# EAGLE board para (EAGLE 6.5.0)
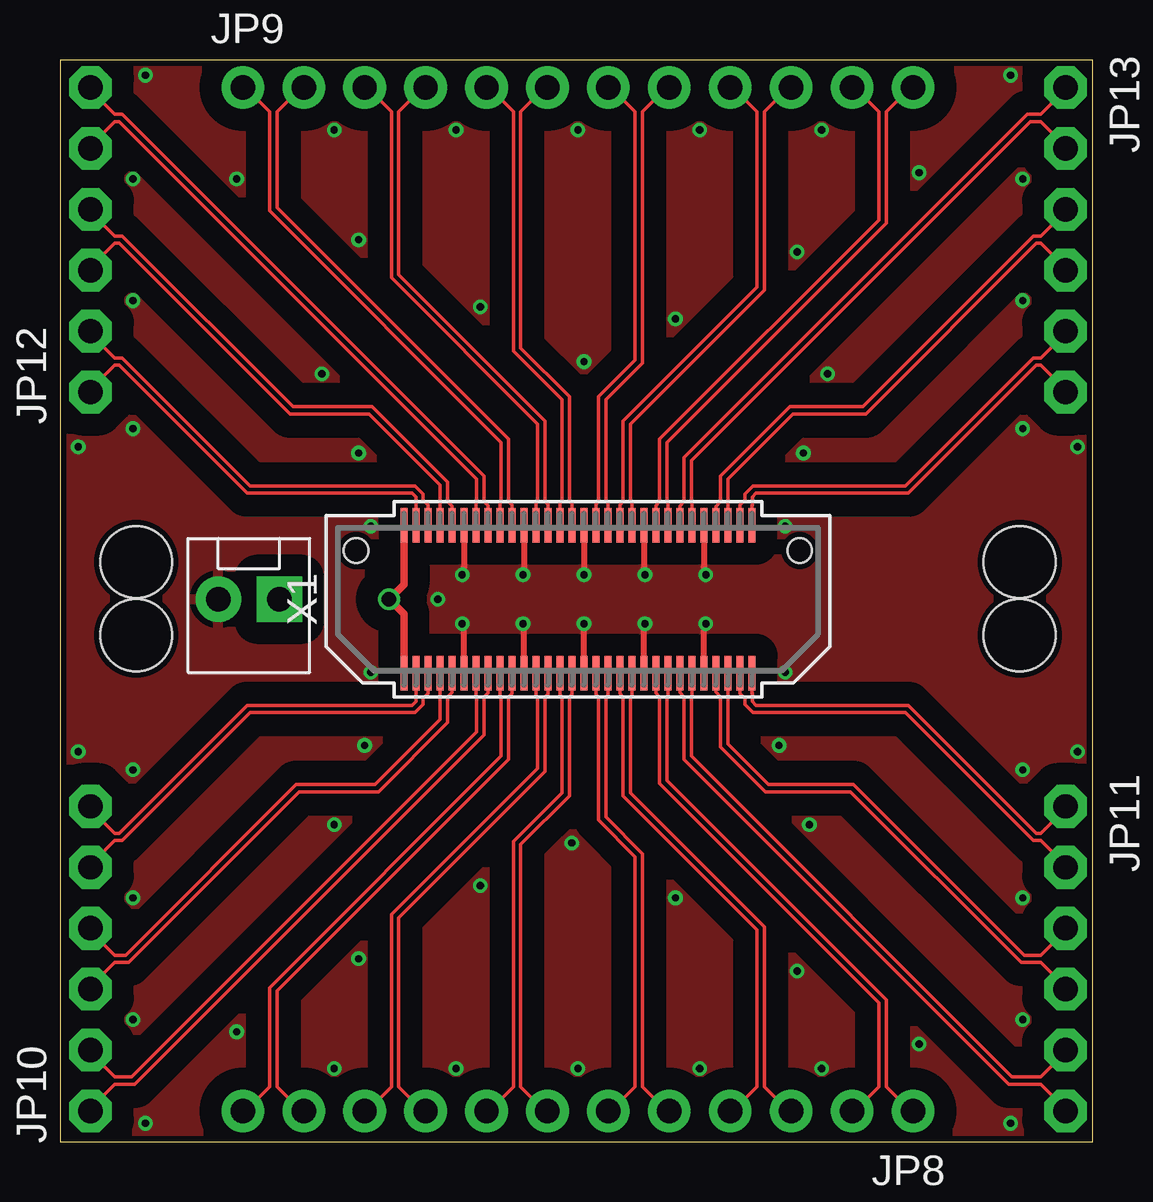
[diagram p0: board, top side]
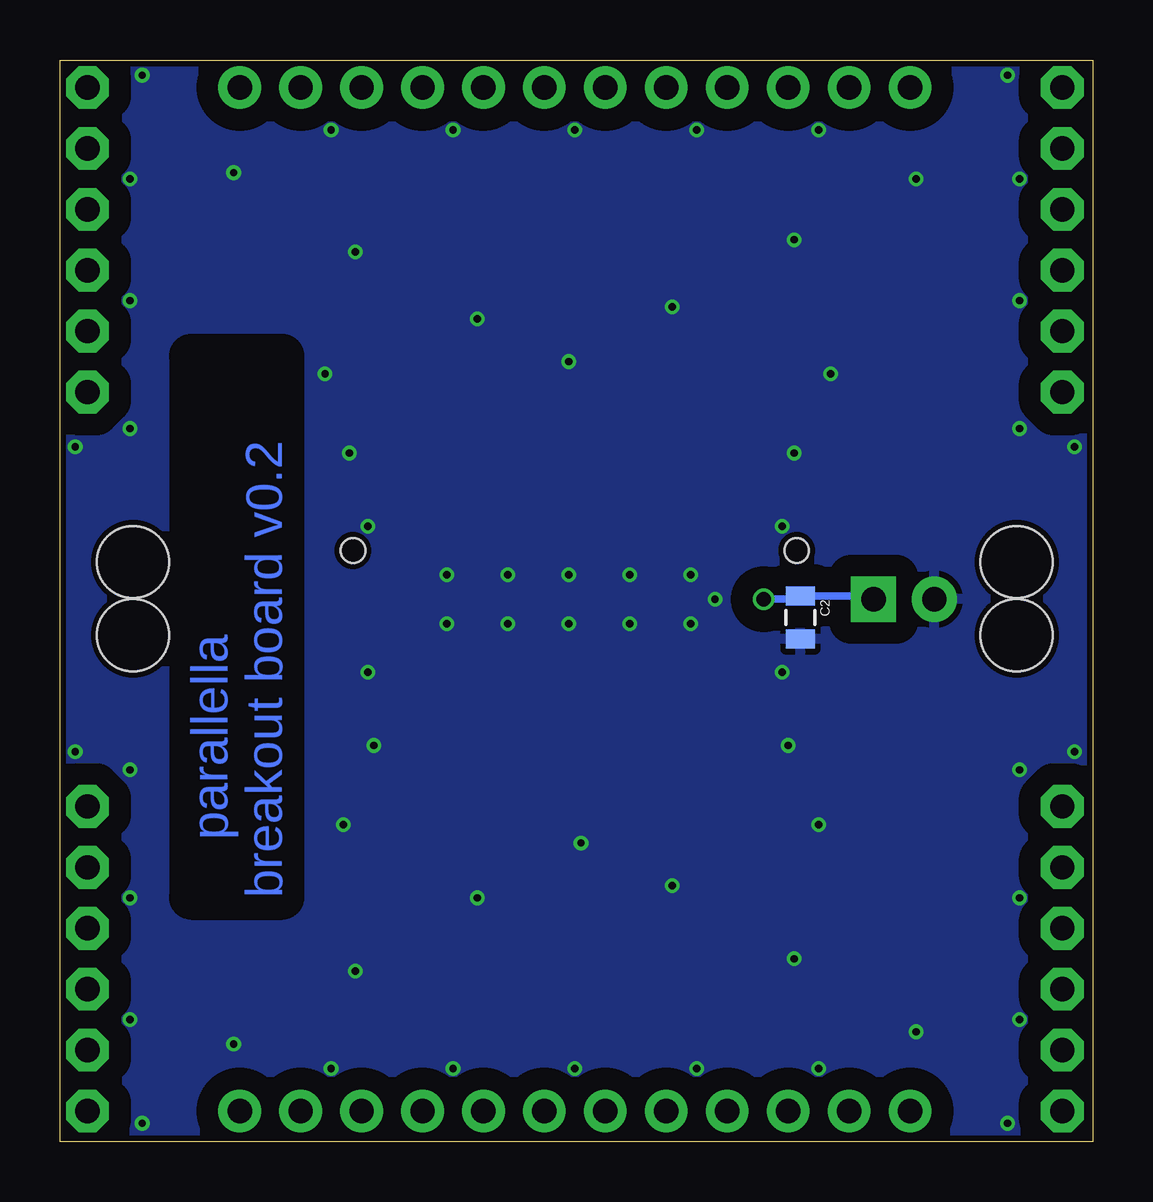
[diagram p1: board, bottom side, seen from below]

Size 43.05 x 45.09 mm. Coordinates in mm from the lower left corner, seen from the top.
Outline: 0,0 43.05,0 43.05,45.09 0,45.09 0,0
Copper layers (1*16): Top 0.035mm / dielectric 1.5mm / Bottom 0.035mm
Design rules "dirt_cheap_dirty_boards.v1": minimum track width 5mil, minimum drill 12mil, track to track 5mil, track to pad 5mil, pad to pad 5mil, via to via 5mil, smd to smd 0mil, copper to edge 10mil, drill to drill 10mil, minimum pad ring 10mil, minimum via ring 6mil, stop-mask expansion 2mil, vias tented up to drill 25mil, thermal gap 10mil
Net classes: 0 default: width 0.254 mm, drill 0.305 mm, clearance 0.254 mm; 1 gnd: width 0.254 mm, drill 0.305 mm, clearance 0.914 mm; 2 sig: width 0.152 mm, drill 0.305 mm, clearance 0.152 mm
Holes 3 mm at 3.17,21.11 3.17,24.16 40.01,24.16 40.01,21.11

## Footprints (pad centres in the part's own frame; a part is rotated, then mirrored left to right if it is on the bottom)
0805 = smd 0.8 x 1.2: 1 -0.9,0; 2 0.9,0
MOLEX-1X2 = drill 1.016 pad 1.88 square: 1 0,0 | drill 1.016 pad 1.88: 2 2.54,0
1X12-CB = drill 1.016 pad 1.778: 1 -13.97,0; 2 -11.43,0; 3 -8.89,0; 4 -6.35,0; 5 -3.81,0; 6 -1.27,0; 7 1.27,0; 8 3.81,0; 9 6.35,0; 10 8.89,0; 11 11.43,0; 12 13.97,0
1X06-CLEANBIG = drill 1.016 pad 1.778 octagon: 1 -6.35,0; 2 -3.81,0; 3 -1.27,0; 4 1.27,0; 5 3.81,0; 6 6.35,0
BTH-030-XX-X-D-A = smd 0.305 x 1.448: 1 -7.25,3.086; 2 -7.25,-3.086; 3 -6.75,3.086; 4 -6.75,-3.086; 5 -6.25,3.086; 6 -6.25,-3.086; 7 -5.75,3.086; 8 -5.75,-3.086; 9 -5.25,3.086; 10 -5.25,-3.086; 11 -4.75,3.086; 12 -4.75,-3.086; 13 -4.25,3.086; 14 -4.25,-3.086; 15 -3.75,3.086; 16 -3.75,-3.086; 17 -3.25,3.086; 18 -3.25,-3.086; 19 -2.75,3.086; 20 -2.75,-3.086; 21 -2.25,3.086; 22 -2.25,-3.086; 23 -1.75,3.086; 24 -1.75,-3.086; 25 -1.25,3.086; 26 -1.25,-3.086; 27 -0.75,3.086; 28 -0.75,-3.086; 29 -0.25,3.086; 30 -0.25,-3.086; 31 0.25,3.086; 32 0.25,-3.086; 33 0.75,3.086; 34 0.75,-3.086; 35 1.25,3.086; 36 1.25,-3.086; 37 1.75,3.086; 38 1.75,-3.086; 39 2.25,3.086; 40 2.25,-3.086; 41 2.75,3.086; 42 2.75,-3.086; 43 3.25,3.086; 44 3.25,-3.086; 45 3.75,3.086; 46 3.75,-3.086; 47 4.25,3.086; 48 4.25,-3.086; 49 4.75,3.086; 50 4.75,-3.086; 51 5.25,3.086; 52 5.25,-3.086; 53 5.75,3.086; 54 5.75,-3.086; 55 6.25,3.086; 56 6.25,-3.086; 57 6.75,3.086; 58 6.75,-3.086; 59 7.25,3.086; 60 7.25,-3.086 | hole 1.016: -9.246,2.032; 9.246,2.032

## Placement (x,y rotation side)
C2  [0805]  12.19,21.84 270 bottom
JP7  M02POLAR  [MOLEX-1X2]  9.14,22.61 180 top
JP8  [1X12-CB]  21.59,1.27 180 top
JP9  [1X12-CB]  21.59,43.94 0 top
JP10  [1X06-CLEANBIG]  1.27,7.62 90 top
JP11  [1X06-CLEANBIG]  41.91,7.62 270 top
JP12  [1X06-CLEANBIG]  1.27,37.59 90 top
JP13  [1X06-CLEANBIG]  41.91,37.59 270 top
X1  BTH-030-XX-X-D-A  [BTH-030-XX-X-D-A]  21.59,22.61 0 top

## Library data of the parts
C2 = SparkFun-Capacitors
JP7 = SparkFun-Connectors
JP8-JP13 = adafruit
X1 = parallella

## Nets
GND [gnd]: C2.2 JP7.2 X1.11 X1.12 X1.21 X1.22 X1.31 X1.32 X1.41 X1.42 X1.51 X1.52
GPIO0_N [sig]: JP12.1 X1.3
GPIO0_P [sig]: JP12.2 X1.5
GPIO1_N [sig]: JP10.6 X1.4
GPIO1_P [sig]: JP10.5 X1.6
GPIO2_N [sig]: JP12.3 X1.7
GPIO2_P [sig]: JP12.4 X1.9
GPIO3_N [sig]: JP10.4 X1.8
GPIO3_P [sig]: JP10.3 X1.10
GPIO4_N [sig]: JP12.5 X1.13
GPIO4_P [sig]: JP12.6 X1.15
GPIO5_N [sig]: JP10.2 X1.14
GPIO5_P [sig]: JP10.1 X1.16
GPIO6_N [sig]: JP9.1 X1.17
GPIO6_P [sig]: JP9.2 X1.19
GPIO7_N [sig]: JP8.12 X1.18
GPIO7_P [sig]: JP8.11 X1.20
GPIO8_N [sig]: JP9.3 X1.23
GPIO8_P [sig]: JP9.4 X1.25
GPIO9_N [sig]: JP8.10 X1.24
GPIO9_P [sig]: JP8.9 X1.26
GPIO10_N [sig]: JP9.5 X1.27
GPIO10_P [sig]: JP9.6 X1.29
GPIO11_N [sig]: JP8.8 X1.28
GPIO11_P [sig]: JP8.7 X1.30
GPIO12_N [sig]: JP9.7 X1.33
GPIO12_P [sig]: JP9.8 X1.35
GPIO13_N [sig]: JP8.6 X1.34
GPIO13_P [sig]: JP8.5 X1.36
GPIO14_N [sig]: JP9.9 X1.37
GPIO14_P [sig]: JP9.10 X1.39
GPIO15_N [sig]: JP8.4 X1.38
GPIO15_P [sig]: JP8.3 X1.40
GPIO16_N [sig]: JP9.11 X1.43
GPIO16_P [sig]: JP9.12 X1.45
GPIO17_N [sig]: JP8.2 X1.44
GPIO17_P [sig]: JP8.1 X1.46
GPIO18_N [sig]: JP13.1 X1.47
GPIO18_P [sig]: JP13.2 X1.49
GPIO19_N [sig]: JP11.6 X1.48
GPIO19_P [sig]: JP11.5 X1.50
GPIO20_N [sig]: JP13.3 X1.53
GPIO20_P [sig]: JP13.4 X1.55
GPIO21_N [sig]: JP11.4 X1.54
GPIO21_P [sig]: JP11.3 X1.56
GPIO22_N [sig]: JP13.5 X1.57
GPIO22_P [sig]: JP13.6 X1.59
GPIO23_N [sig]: JP11.2 X1.58
GPIO23_P [sig]: JP11.1 X1.60
VCC [gnd]: C2.1 JP7.1 X1.1 X1.2

## Tracks (layer width: path | path; a pad name or v marks a point on that pad's centre or on a via)
GND  (via drill 0.3)
  Top 0.254: X1.11 16.84,23.95 v16.76,23.62 | X1.21 19.34,23.91 v19.3,23.62 | X1.31 21.84,23.88 v21.84,23.62 | X1.41 24.34,23.92 v24.38,23.62 | X1.51 26.84,23.96 v26.92,23.62 | X1.52 26.84,21.25 v26.92,21.59 | X1.42 24.34,21.29 v24.38,21.59 | X1.32 21.84,21.33 v21.84,21.59 | X1.22 19.34,21.3 v19.3,21.59 | X1.12 16.84,21.26 v16.76,21.59
  other vias: 3.05,35.05 12.45,28.7 3.05,40.13 10.92,32 3.56,44.45 11.43,42.16 16.51,42.16 21.59,42.16 26.67,42.16 31.75,42.16 39.62,44.45 40.13,40.13 40.13,35.05 12.45,37.59 17.53,34.8 21.84,32.51 25.65,34.29 30.73,37.08 35.81,40.39 7.37,40.13 32,32 30.99,28.7 3.05,15.49 3.05,29.72 3.05,10.16 3.05,5.08 3.56,0.76 11.43,3.05 16.51,3.05 21.59,3.05 26.67,3.05 31.75,3.05 39.62,0.76 40.13,5.08 40.13,10.16 40.13,15.49 40.13,29.72 12.7,16.51 11.43,13.21 7.37,4.57 12.45,7.62 17.53,10.67 21.34,12.45 25.65,10.16 30.73,7.11 35.81,4.06 31.24,13.21 29.97,16.51 15.75,22.61 12.95,25.65 12.95,19.56 30.23,25.65 30.23,19.56 0.76,28.96 0.76,16.26 42.42,16.26 42.42,28.96
  pour Top: -1.27,45.72 44.45,45.72 44.45,-1.27 -1.27,-1.27
  pour Bottom: -1.27,45.72 44.45,45.72 44.45,-1.27 -1.27,-1.27
GPIO0_N
  Top 0.152: JP12.1 1.27,31.34 2.29,32.36 2.48,32.36 7.81,27.03 14.67,27.03 14.83,26.86 14.83,26.52 14.84,26.52 X1.3
GPIO0_P
  Top 0.152: JP12.2 1.27,33.68 2.29,32.66 2.6,32.66 7.94,27.33 14.79,27.33 15.14,26.99 15.14,26.73 15.34,26.53 X1.5
GPIO1_N
  Top 0.152: X1.4 14.84,18.69 14.83,18.69 14.83,18.35 14.67,18.19 7.81,18.19 2.48,12.85 2.29,12.85 1.27,13.87 JP10.6
GPIO1_P
  Top 0.152: X1.6 15.34,18.68 15.14,18.48 15.14,18.23 14.79,17.88 7.94,17.88 2.6,12.55 2.29,12.55 1.27,11.53 JP10.5
GPIO2_N
  Top 0.152: X1.7 15.84,26.66 15.85,26.67 15.85,27.37 12.89,30.33 9.59,30.33 2.48,37.44 2.29,37.44 1.27,36.42 JP12.3
GPIO2_P
  Top 0.152: X1.9 16.34,26.48 16.15,26.67 16.15,27.5 13.02,30.63 9.71,30.63 2.6,37.74 2.29,37.74 1.27,38.76 JP12.4
GPIO3_N
  Top 0.152: X1.8 15.84,18.55 15.85,18.54 15.85,17.59 13.14,14.88 9.84,14.88 2.73,7.77 2.29,7.77 1.27,8.79 JP10.4
GPIO3_P
  Top 0.152: X1.10 16.34,18.73 16.15,18.54 16.15,17.46 13.27,14.58 9.97,14.58 2.86,7.47 2.29,7.47 1.27,6.45 JP10.3
GPIO4_N
  Top 0.152: JP12.5 1.27,41.5 2.29,42.52 2.48,42.52 17.37,27.62 17.37,26.67 17.34,26.64 X1.13
GPIO4_P
  Top 0.152: JP12.6 1.27,43.84 2.29,42.82 2.6,42.82 17.68,27.75 17.68,26.67 17.84,26.51 X1.15
GPIO5_N
  Top 0.152: X1.14 17.34,18.58 17.37,18.54 17.37,17.08 2.98,2.69 2.29,2.69 1.27,3.71 JP10.2
GPIO5_P
  Top 0.152: X1.16 17.84,18.7 17.68,18.54 17.68,16.95 3.11,2.39 2.29,2.39 1.27,1.37 JP10.1
GPIO6_N
  Top 0.152: X1.17 18.34,26.62 18.39,26.67 18.39,29.15 8.74,38.8 8.74,42.93 7.72,43.94 JP9.1
GPIO6_P
  Top 0.152: X1.19 18.84,26.52 18.69,26.67 18.69,29.27 9.04,38.92 9.04,42.93 10.06,43.94 JP9.2
GPIO7_N
  Top 0.152: JP8.12 7.72,1.27 8.74,2.29 8.74,6.41 18.39,16.07 18.39,18.54 18.34,18.59 X1.18
GPIO7_P
  Top 0.152: JP8.11 10.06,1.27 9.04,2.29 9.04,6.29 18.69,15.94 18.69,18.54 18.84,18.69 X1.20
GPIO8_N
  Top 0.152: X1.23 19.84,26.6 19.91,26.67 19.91,29.91 13.82,36.01 13.82,42.93 12.8,43.94 JP9.3
GPIO8_P
  Top 0.152: X1.25 20.34,26.55 20.22,26.67 20.22,30.04 14.12,36.13 14.12,42.93 15.14,43.94 JP9.4
GPIO9_N
  Top 0.152: JP8.10 12.8,1.27 13.82,2.29 13.82,9.46 19.91,15.56 19.91,18.54 19.84,18.62 X1.24
GPIO9_P
  Top 0.152: JP8.9 15.14,1.27 14.12,2.29 14.12,9.34 20.22,15.43 20.22,18.54 20.34,18.66 X1.26
GPIO10_N
  Top 0.152: X1.27 20.84,26.58 20.93,26.67 20.93,30.93 18.9,32.96 18.9,42.93 17.88,43.94 JP9.5
GPIO10_P
  Top 0.152: X1.29 21.34,26.56 21.23,26.67 21.23,31.05 19.2,33.08 19.2,42.93 20.22,43.94 JP9.6
GPIO11_N
  Top 0.152: JP8.8 17.88,1.27 18.9,2.29 18.9,12.51 20.93,14.54 20.93,18.54 20.84,18.63 X1.28
GPIO11_P
  Top 0.152: JP8.7 20.22,1.27 19.2,2.29 19.2,12.38 21.23,14.41 21.23,18.54 21.34,18.65 X1.30
GPIO12_N
  Top 0.152: X1.33 22.34,26.56 22.45,26.67 22.45,31.05 23.98,32.58 23.98,42.93 22.96,43.94 JP9.7
GPIO12_P
  Top 0.152: X1.35 22.84,26.59 22.76,26.67 22.76,30.93 24.28,32.45 24.28,42.93 25.3,43.94 JP9.8
GPIO13_N
  Top 0.152: JP8.6 22.96,1.27 23.98,2.29 23.98,11.88 22.45,13.4 22.45,18.54 22.34,18.66 X1.34
GPIO13_P
  Top 0.152: JP8.5 25.3,1.27 24.28,2.29 24.28,12 22.76,13.53 22.76,18.54 22.84,18.62 X1.36
GPIO14_N
  Top 0.152: X1.37 23.34,26.54 23.47,26.67 23.47,30.04 29.06,35.62 29.06,42.93 28.04,43.94 JP9.9
GPIO14_P
  Top 0.152: X1.39 23.84,26.6 23.77,26.67 23.77,29.91 29.36,35.5 29.36,42.93 30.38,43.94 JP9.10
GPIO15_N
  Top 0.152: JP8.4 28.04,1.27 29.06,2.29 29.06,8.83 23.47,14.41 23.47,18.54 23.34,18.67 X1.38
GPIO15_P
  Top 0.152: JP8.3 30.38,1.27 29.36,2.29 29.36,8.95 23.77,14.54 23.77,18.54 23.84,18.61 X1.40
GPIO16_N
  Top 0.152: X1.43 24.84,26.52 24.99,26.67 24.99,29.27 34.14,38.42 34.14,42.93 33.12,43.94 JP9.11
GPIO16_P
  Top 0.152: X1.45 25.34,26.63 25.3,26.67 25.3,29.15 34.44,38.29 34.44,42.93 35.46,43.94 JP9.12
GPIO17_N
  Top 0.152: JP8.2 33.12,1.27 34.14,2.29 34.14,5.78 24.99,14.92 24.99,18.54 24.84,18.7 X1.44
GPIO17_P
  Top 0.152: JP8.1 35.46,1.27 34.44,2.29 34.44,5.91 25.3,15.05 25.3,18.54 25.34,18.58 X1.46
GPIO18_N
  Top 0.152: X1.47 25.84,26.5 26.01,26.67 26.01,28.51 40.32,42.82 40.89,42.82 41.91,43.84 JP13.1
GPIO18_P
  Top 0.152: X1.49 26.34,26.64 26.31,26.67 26.31,28.39 40.45,42.52 40.89,42.52 41.91,41.5 JP13.2
GPIO19_N
  Top 0.152: X1.48 25.84,18.71 26.01,18.54 26.01,15.94 39.56,2.39 40.89,2.39 41.91,1.37 JP11.6
GPIO19_P
  Top 0.152: X1.50 26.34,18.57 26.31,18.54 26.31,16.07 39.69,2.69 40.89,2.69 41.91,3.71 JP11.5
GPIO20_N
  Top 0.152: X1.53 27.34,26.48 27.53,26.67 27.53,27.75 30.42,30.63 33.47,30.63 40.58,37.74 40.89,37.74 41.91,38.76 JP13.3
GPIO20_P
  Top 0.152: X1.55 27.84,26.67 27.84,27.62 30.54,30.33 33.59,30.33 40.7,37.44 40.89,37.44 41.91,36.42 JP13.4
GPIO21_N
  Top 0.152: JP11.4 41.91,6.45 40.89,7.47 40.07,7.47 32.96,14.58 29.4,14.58 27.53,16.45 27.53,18.54 27.34,18.74 X1.54
GPIO21_P
  Top 0.152: JP11.3 41.91,8.79 40.89,7.77 40.2,7.77 33.08,14.88 29.53,14.88 27.84,16.57 27.84,18.54 X1.56
GPIO22_N
  Top 0.152: X1.57 28.34,26.52 28.55,26.73 28.55,26.99 28.89,27.33 35.24,27.33 40.58,32.66 40.89,32.66 41.91,33.68 JP13.5
GPIO22_P
  Top 0.152: X1.59 28.84,26.53 28.85,26.52 28.85,26.86 29.02,27.03 35.37,27.03 40.7,32.36 40.89,32.36 41.91,31.34 JP13.6
GPIO23_N
  Top 0.152: X1.58 28.34,18.69 28.55,18.48 28.55,18.23 28.89,17.88 35.24,17.88 40.58,12.55 40.89,12.55 41.91,11.53 JP11.2
GPIO23_P
  Top 0.152: X1.60 28.84,18.68 28.85,18.69 28.85,18.35 29.02,18.19 35.37,18.19 40.7,12.85 40.89,12.85 41.91,13.87 JP11.1
VCC  (via drill 0.6)
  Top 0.305: X1.2 14.34,21.98 v13.72,22.61 14.34,23.23 X1.1
  Bottom 0.305: v13.72,22.61 12.33,22.61 C2.1 9.28,22.74 JP7.1

## Text on the board
Bottom: parallella / breakout board v0.2